# EAGLE board psRevA (EAGLE 7.4.0)
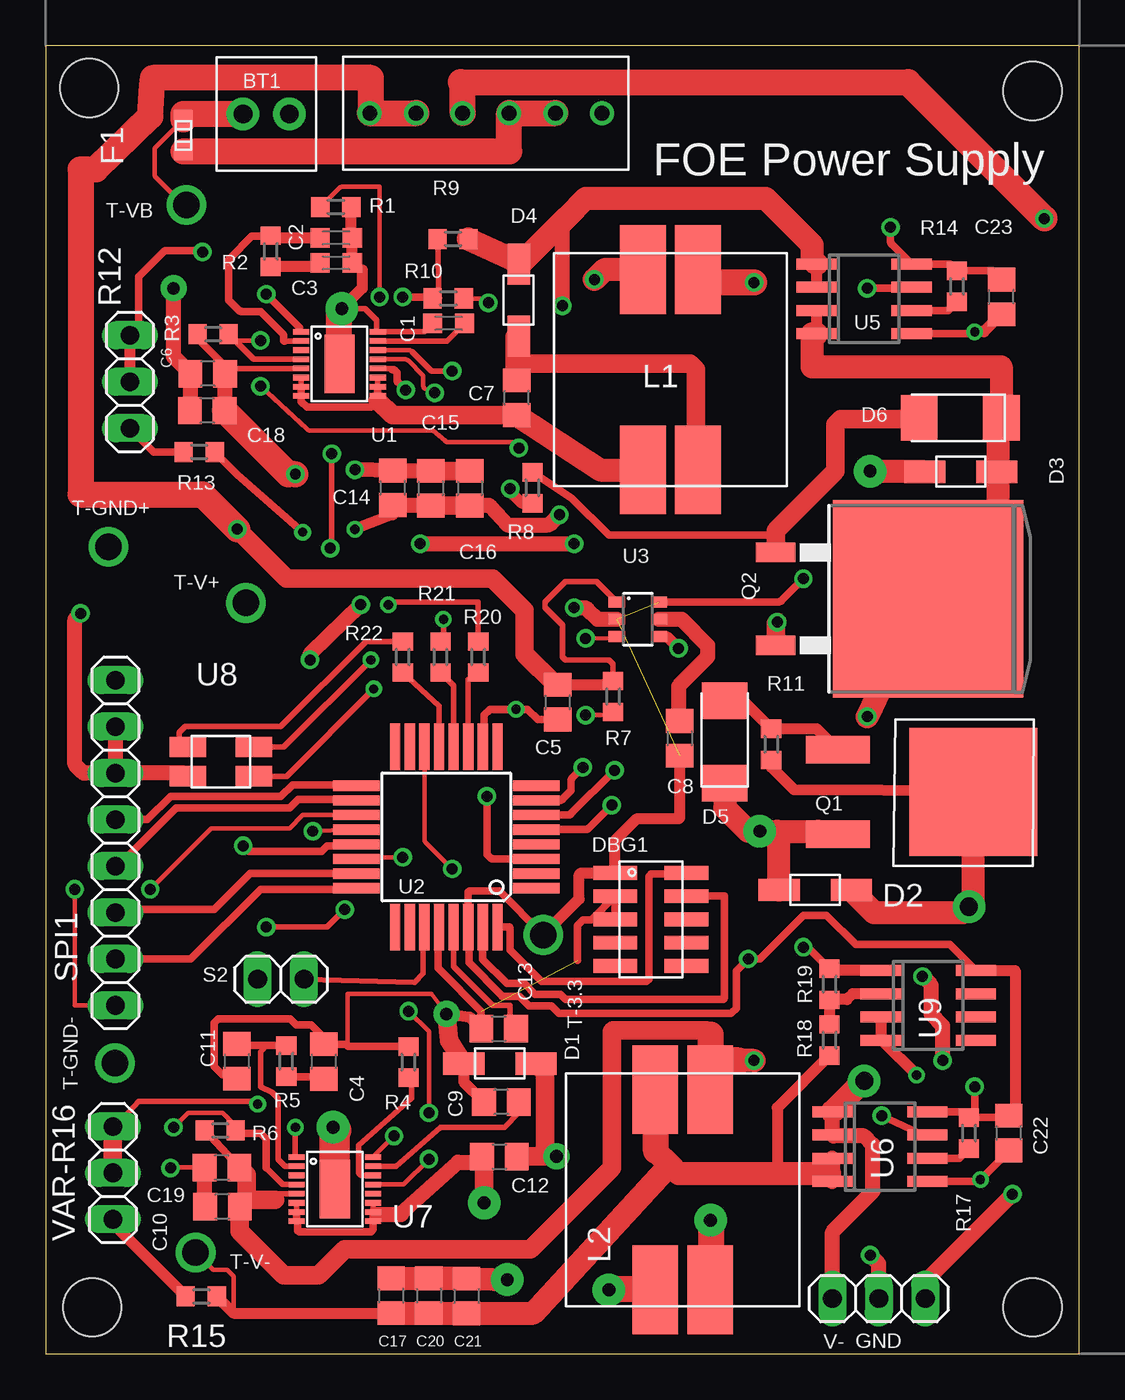
[diagram p0: board, top side]
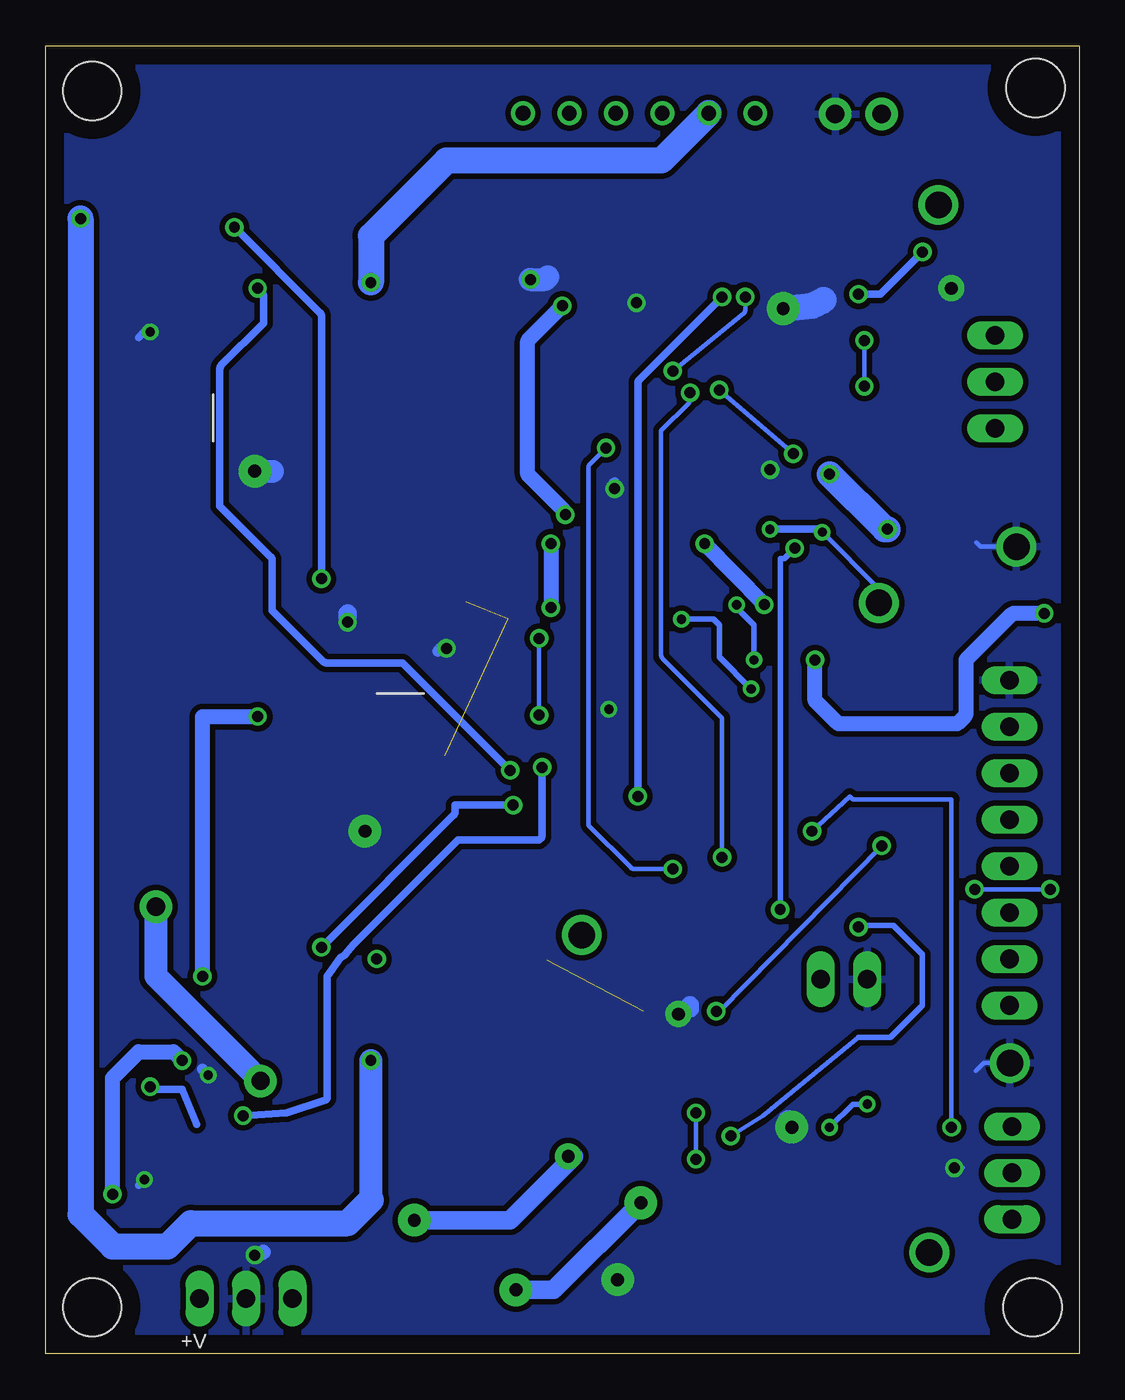
[diagram p1: board, bottom side, seen from below]

Size 56.52 x 71.53 mm. Coordinates in mm from the lower left corner, seen from the top.
Outline: 0,0 56.52,0 56.52,71.53 0,71.53 0,0
Copper layers (1*16): Top 0.035mm / dielectric 1.5mm / Bottom 0.035mm
Design rules "default *": minimum track width 10mil, minimum drill 18mil, track to track 8mil, track to pad 8mil, pad to pad 8mil, via to via 8mil, smd to smd 8mil, copper to edge 40mil, drill to drill 8mil, minimum pad ring 10mil, minimum via ring 8mil, stop-mask expansion 4mil, vias tented up to drill 0mil, thermal gap 10mil
Holes 3.2 mm at 2.54,2.54 53.98,2.54 53.98,69.06 2.38,69.22

## Footprints (pad centres in the part's own frame; a part is rotated, then mirrored left to right if it is on the bottom)
POWERHEAD = drill 1.016 pad 1.778: P$1 -1.27,0; P$2 1.27,0
C0603K = smd 1.05 x 1.08: 1 -0.875,0; 2 0.875,0
C0805 = smd 1.3 x 1.5: 1 -0.95,0; 2 0.95,0
SCHTKYDIODE = smd 2.25 x 1.22: A 3.95,0; C 0,0
ZENER = smd 2 x 2.5: A -0.25,0; C 4.25,0
DEBUGHEAD = smd 0.76 x 2.4: DGND1 1.27,-3.9; DGND2 2.54,-3.9; NC1 3.81,-3.9; NC2 5.08,-3.9; NC3 3.81,0; NC4 2.54,0; NRESET 5.08,0; SWDCLK 1.27,0; SWDIO 0,0; VREF 0,-3.9
FUSE = smd 1 x 1: 1 0,0; 2 1.74,0
COUPLED_INDUCTOR@1 = smd 4.85 x 2.5: L1A 0,3; L1B 10.95,0; L2A 0,0; L2B 10.95,3
COUPLED_INDUCTOR = smd 4.85 x 2.5: L1A 0,3; L1B 10.95,0; L2A 0,0; L2B 10.95,3
DPAKTO252 = smd 1.5 x 3.5: 1 0,-0.5; 3 4.6,-0.5 | smd 7 x 7: 2 2.3,6.9
TO263-3 = smd 1.067 x 2.159: 1 -2.54,-5.791; 3 2.54,-5.791 | smd 10.8 x 10.41: TAB 0,2.54
R0603 = smd 1 x 1.1: 1 -0.85,0; 2 0.85,0
1X03 = drill 1.016 long: 1 -2.54,0; 2 0,0; 3 2.54,0
SWITCHHEAD = drill 0.8: INPUT1 1.27,0; INPUT2 3.81,0; NC 6.35,0; O1 -1.27,0; O3 -6.35,0; O4 -3.81,0
1X02 = drill 1.016 long: 1 -1.27,0; 2 1.27,0
1X08 = drill 1.016 long: 1 -8.89,0; 2 -6.35,0; 3 -3.81,0; 4 -1.27,0; 5 1.27,0; 6 3.81,0; 7 6.35,0; 8 8.89,0
TEST_POINT = drill 1.448: P$1 0,0
LT3581 = smd 0.305 x 0.889: CLKOUT 2.002,4.191; FAULT 1.501,0; FB 0,0; GATE 1.001,0; RT 1.001,4.191; SHDN 1.501,4.191; SS 0.5,4.191; SW1A 2.502,0; SW1B 3.002,0; SW1C 3.503,0; SW2A 2.502,4.191; SW2B 3.002,4.191; SW2C 3.503,4.191; SYNC 0,4.191; VC 0.5,0; VIN 2.002,0 | smd 3.2 x 1.651: GND 1.751,2.095
TQFP32-08 = smd 2.54 x 0.559: 1 -4.928,2.8; 2 -4.928,2; 3 -4.928,1.2; 4 -4.928,0.4; 5 -4.928,-0.4; 6 -4.928,-1.2; 7 -4.928,-2; 8 -4.928,-2.8; 17 4.928,-2.8; 18 4.928,-2; 19 4.928,-1.2; 20 4.928,-0.4; 21 4.928,0.4; 22 4.928,1.2; 23 4.928,2; 24 4.928,2.8 | smd 0.559 x 2.54: 9 -2.8,-4.928; 10 -2,-4.928; 11 -1.2,-4.928; 12 -0.4,-4.928; 13 0.4,-4.928; 14 1.2,-4.928; 15 2,-4.928; 16 2.8,-4.928; 25 2.8,4.928; 26 2,4.928; 27 1.2,4.928; 28 0.4,4.928; 29 -0.4,4.928; 30 -1.2,4.928; 31 -2,4.928; 32 -2.8,4.928
SOT23-6 = smd 0.6 x 0.9: 1 -0.95,-1.15; 2 0,-1.15; 3 0.95,-1.15; 4 0.95,1.15; 5 0,1.15; 6 -0.95,1.15
SOIC8 = smd 0.6 x 2.2: 1 -1.905,-2.6; 2 -0.635,-2.6; 3 0.635,-2.6; 4 1.905,-2.6; 5 1.905,2.6; 6 0.635,2.6; 7 -0.635,2.6; 8 -1.905,2.6
RGBLED = smd 2 x 1.1: 1-RED 0,0; 3-BLUE 3.6,-1.6; 4-GREEN 3.6,0; A 0,-1.6

## Placement (x,y rotation side)
BT1  BATTERY  [POWERHEAD]  12.06,67.79 180 top
C1  100nF  [C0603K]  22.03,56.35 180 top
C2  1nF  [C0603K]  15.89,61.02 0 top
C3  47pF  [C0603K]  15.89,59.65 0 top
C4  47pF  [C0805]  15.21,15.98 90 top
C5  1uF  [C0805]  27.99,35.64 270 top
C6  6.8uF  [C0805]  8.86,53.59 180 top
C7  1uF  [C0805]  25.76,52.27 90 top
C8  10nF  [C0805]  34.67,33.66 270 top
C9  100nF  [C0805]  24.92,13.77 180 top
C10  6.8uF  [C0805]  9.66,8.05 180 top
C11  1nF  [C0805]  10.45,16 270 top
C12  1uF  [C0805]  24.82,10.78 0 top
C13  100nF  [C0805]  24.77,17.78 0 top
C14  10uF  [C0805]  18.97,47.35 270 top
C15  10uF  [C0805]  21.06,47.33 270 top
C16  10uF  [C0805]  23.2,47.33 270 top
C17  3x10uF  [C0805]  18.88,3.17 270 top
C18  6.8uF  [C0805]  8.84,51.57 180 top
C19  6.8uF  [C0805]  9.64,10.19 180 top
C20  10uF  [C0805]  20.95,3.17 270 top
C21  10uF  [C0805]  23.01,3.17 270 top
C22  0.1uF  [C0805]  52.67,12.08 90 top
C23  0.1uF  [C0805]  52.26,57.78 90 top
D1  SCHTKYDIODE  [SCHTKYDIODE]  22.86,15.88 0 top
D2  SCHTKYDIODE  [SCHTKYDIODE]  40.11,25.36 0 top
D3  SCHTKYDIODE  [SCHTKYDIODE]  52.02,48.23 180 top
D4  SCHTKYDIODE  [SCHTKYDIODE]  25.86,59.59 270 top
D5  ZENER  [ZENER]  37.13,35.46 270 top
D6  ZENER  [ZENER]  48.01,51.18 0 top
DBG1  DEBUGHEAD  [DEBUGHEAD]  35.04,26.29 270 top
F1  FUSE  [FUSE]  7.52,67.49 270 top
L1  6.58 uH  [COUPLED_INDUCTOR@1]  32.66,59.28 270 top
L2  6.58 uH  [COUPLED_INDUCTOR]  33.34,14.45 270 top
Q1  PNPDARL  [DPAKTO252]  43.81,33.02 270 top
Q2  NPNDARL  [TO263-3]  45.72,41.27 270 top
R1  180K  [R0603]  15.86,62.7 0 top
R2  11K  [R0603]  12.31,60.29 90 top
R3  100K  [R0603]  9.16,55.75 0 top
R4  180K  [R0603]  19.84,15.95 90 top
R5  11K  [R0603]  13.16,16 90 top
R6  100K  [R0603]  9.54,12.21 0 top
R7  10K  [R0603]  31.03,35.94 270 top
R8  390  [R0603]  26.61,47.35 90 top
R9  698K  [R0603]  22.27,60.96 0 top
R10  300K  [R0603]  22.01,57.71 180 top
R11  390  [R0603]  39.67,33.32 90 top
R12  VARRESISTOR  [1X03]  4.6,53.15 90 top
R13  5k  [R0603]  8.39,49.31 180 top
R14  1k  [R0603]  49.83,58.37 90 top
R15  5k  [R0603]  8.51,3.14 180 top
R17  1k  [R0603]  50.48,12.06 90 top
R18  1M  [R0603]  42.86,17.16 270 top
R19  300k  [R0603]  42.86,20.21 270 top
R20  15  [R0603]  23.65,38.1 90 top
R21  15  [R0603]  21.59,38.1 90 top
R22  70  [R0603]  19.53,38.1 90 top
S1  DPDT  [SWITCHHEAD]  24.07,67.84 0 top
S2  PUSHBTN  [1X02]  12.86,20.48 0 top
SPI1  OLED  [1X08]  3.81,27.94 90 top
T-3.3  TEST_POINT  [TEST_POINT]  27.21,22.9 0 top
T-GND+  TEST_POINT  [TEST_POINT]  3.43,44.13 0 top
T-GND-  TEST_POINT  [TEST_POINT]  3.79,15.89 0 top
T-V+  TEST_POINT  [TEST_POINT]  10.95,41.06 90 top
T-V-  TEST_POINT  [TEST_POINT]  8.2,5.54 0 top
T-VB  TEST_POINT  [TEST_POINT]  7.7,62.83 0 top
U1  LT3581  [LT3581]  13.97,55.88 270 top
U2  SAMD21E  [TQFP32-08]  21.91,28.26 180 top
U3  AS1363  [SOT23-6]  32.38,40.16 270 top
U4  VOUT  [1X03]  45.56,3.02 180 top
U5  ACS711  [SOIC8]  44.75,57.68 270 top
U6  ACS711  [SOIC8]  45.62,11.33 270 top
U7  LT3581  [LT3581]  13.72,10.76 270 top
U8  RGBLED  [RGBLED]  7.78,33.18 0 top
U9  LMC6482  [SOIC8]  48.26,19.05 270 top
VAR-R16  VARRESISTOR  [1X03]  3.67,9.89 90 top

## Library data of the parts
BT1 D1-D6 F1 L1 L2 Q1 Q2 R12 S1 S2 SPI1 T-3.3 T-GND+ T-GND- T-V+ T-V- T-VB U1-U9 VAR-R16 = ps-custom
C1-C23 R1-R11 R13-R15 R17-R22 = resistor
DBG1 = foe-scale

## Nets
3.3V: C8.2 C22.2 C23.2 DBG1.VREF R14.2 R17.2 SPI1.6 SPI1.7 T-3.3.P$1 U2.30 U3.2 U3.6 U5.8 U6.8 U8.A U9.8
GND: BT1.P$1 C1.2 C2.2 C3.2 C4.2 C5.2 C6.2 C9.2 C10.2 C11.2 C13.1 C14.1 C15.1 C16.1 C17.1 C18.2 C19.2 C20.1 C21.1 C22.1 C23.1 D1.C D2.C D3.A D5.C DBG1.DGND1 DBG1.DGND2 L1.L2A Q1.3 Q2.3 R1.2 R4.2 R8.1 R10.1 S2.1 SPI1.8 T-GND+.P$1 T-GND-.P$1 U1.GND U1.SYNC U2.10 U2.28 U3.4 U4.2 U5.5 U6.5 U7.GND U9.3 U9.4
N$1: R1.1 U1.RT
N$2: C1.1 U1.SS
N$3: C3.1 R2.1
N$4: C2.1 R2.2 U1.VC
N$5: R4.1 U7.RT
N$6: C9.1 U7.SS
N$7: C4.1 R5.1
N$8: C11.1 R5.2 U7.VC
N$9: S2.2 U2.27
N$10: D3.C D6.C Q2.TAB U4.1 U5.3 U5.4
N$11: C12.2 D1.A L2.L2B
N$12: R17.1 U6.6
N$13: C8.1 U3.5
N$14: U7.FB VAR-R16.2 VAR-R16.3
N$15: R12.2 R12.3 U1.FB
N$16: R7.2 U3.3
N$17: D5.A Q1.1 R11.2
N$18: D6.A Q2.1 R8.2
N$19: BT1.P$2 F1.1 T-VB.P$1
N$20: C7.1 L1.L1B U1.SW1A U1.SW1B U1.SW1C U1.SW2A U1.SW2B U1.SW2C
N$21: C12.1 L2.L1B U7.SW1A U7.SW1B U7.SW1C U7.SW2A U7.SW2B U7.SW2C
N$22: R15.2 VAR-R16.1
N$23: C7.2 D4.A L1.L2B
N$25: C17.2 C20.2 C21.2 L2.L2A R15.1 R18.2 T-V-.P$1 U6.3 U6.4
N$26: C14.2 C15.2 C16.2 D4.C R9.2 R13.1 T-V+.P$1 U5.1 U5.2
N$27: R12.1 R13.2
N$28: R18.1 R19.2 U9.2
N$30: R14.1 U5.6
N$31: R20.2 U8.4-GREEN
N$32: R21.2 U8.3-BLUE
N$33: R22.2 U8.1-RED
N$34: D2.A Q1.2 R11.1 U4.3 U6.1 U6.2
N$35: R20.1 U2.11
N$36: R21.1 U2.12
N$37: R22.1 U2.13
N$43: C13.2 U2.29
N$44: DBG1.SWDIO U2.32
N$45: DBG1.SWDCLK U2.31
N$46: SPI1.1 U2.19
N$47: SPI1.2 U2.24
N$48: SPI1.3 U2.23
N$49: SPI1.5 U2.17
N$51: SPI1.4 U2.18
N$53: F1.2 S1.INPUT1 S1.INPUT2
PA02-V+SENSE: R9.1 R10.2 U2.3
PA04-V-SENSE: R19.1 U2.5 U9.1
PA05-I+: U2.6 U5.7
PA06-I-: U2.7 U6.7
PA11-FAULT1: R3.2 U1.FAULT U2.14
PA19-FAULT2: R6.2 U2.20 U7.FAULT
PA22-SHDN2: U2.21 U7.SHDN
PA23-SHDN1: U1.SHDN U2.22
SYNC: U1.CLKOUT U7.SYNC
VIN+: C5.1 C6.1 C18.1 L1.L1A R3.1 R7.1 S1.O3 S1.O4 U1.VIN U3.1
VIN-: C10.1 C19.1 L2.L1A R6.1 S1.O1 U7.VIN

## Tracks (layer width: path | path; a pad name or v marks a point on that pad's centre or on a via)
3.3V  (via drill 0.6, 0.6 pad 0.03, 0.6 pad 0.38)  (2 unrouted)
  Top 0.406: U6.8 50.48,13.23 R17.2 | R17.2 52.67,12.91 C22.2 | C23.2 51.79,59.22 R14.2 49.47,59.59 U5.8 46.27,60.67 arc-45 46.2,60.85 v46.2,61.59 | U3.6 40.06,41.11 arc45 40.24,41.19 v41.43,42.39 | v50.8,14.61 50.8,13.34 arc-45 50.73,13.16 R17.2 | U9.8 49.43,22.38 44.29,22.38 42.7,23.97 41.43,23.97 39.05,21.59 v38.42,21.59 37.76,20.93 37.76,18.89 37.48,18.61 28.08,18.61 27.66,19.03 26.43,19.03 25.92,19.55 24.96,19.55 24.96,19.57 23.14,21.39 23.14,23.3 U2.30 23.11,25.25 23.18,25.32 24.7,25.32 24.73,25.3 24.8,25.3 T-3.3.P$1
  Top 0.61: U9.8 53.02,20.95 53.02,13.38 C22.2 | C8.2 34.67,29.31 34.63,29.27 32.34,29.27 31.14,28.06 31.14,26.3 DBG1.VREF 29.27,26.29 29.17,26.19 29.17,24.86 T-3.3.P$1
  Top 0.813: SPI1.7 SPI1.6 | U8.A 7.61,31.75 SPI1.6 | SPI1.6 2.17,31.75 arc-45 1.99,31.82 1.59,32.23 1.59,40.06 arc-45 1.66,40.24 v1.91,40.48 | v14.45,37.94 14.45,38.15 arc-45 14.52,38.33 v17.22,40.96 | v20.48,44.29 v28.89,44.29 | v28.89,40.8 29.42,40.8 arc-45 29.6,40.72 30.16,40.16 U3.2
  Bottom 0.406: v41.43,42.39 41.43,56.73 arc-45 41.51,56.91 v46.2,61.59 | 48.26,12.54 49.05,14.45 50.54,14.45 arc45 50.72,14.52 v50.8,14.61
  Bottom 0.813: v17.22,40.96 v20.48,44.29 | v28.89,44.29 v28.89,40.8 | v1.91,40.48 3.55,40.48 arc-45 3.73,40.41 6.19,37.94 6.19,35.03 arc45 6.27,34.85 6.67,34.45 13.07,34.45 arc45 13.25,34.52 14.45,35.72 v14.45,37.94
GND  (via drill 0.5, 0.6, 0.6 pad 0.03, 0.6 pad 0.38, 0.7 pad 1.42, 0.7 pad 1.78)  (1 unrouted)
  Top 0.254: 21.5,56.03 C1.2 | 16.51,16.83 16.51,19.68 21.11,19.68 v21.91,18.57 | C19.2 6.85,10.19 v6.83,10.16 | R10.1 23.78,57.71 arc-45 23.96,57.63 v24.21,57.47
  Top 0.305: v16.19,57.15 17.46,57.15 18.1,56.52 18.1,55.94 U1.SYNC 20.69,55.88 C1.2
  Top 0.406: U6.5 51.02,9.42 v51.12,9.53 52.67,11.07 C22.1 | U5.5 50.7,55.78 v50.8,55.88 | C13.1 23.82,18.73 21.59,20.95 21.59,20.97 21.45,21.1 21.45,23.28 U2.28 | 15.34,16.8 C4.2 15.56,16.93 | 15.56,16.93 16.41,16.93 16.51,16.83 16.54,16.8 R4.2 | C11.2 10.73,15.24 9.68,15.24 9.21,15.72 9.21,17.78 | 9.21,17.78 | 9.21,17.78 9.21,18.08 9.44,18.31 13.37,18.31 13.7,17.99 14.5,17.99 15.56,16.93 | C5.2 26.91,34.69 26.35,35.24 v25.72,35.24 24.29,35.24 23.97,34.92 23.97,34.13 23.81,33.97 23.81,33.28 U2.10 | DBG1.DGND2 DBG1.DGND1 29.83,23.71 29.37,23.71 29.09,23.43 29.09,21.51
  Top 0.61: U9.3 U9.4 45.72,17.14 v47.62,15.24 | C23.1 51.31,55.88 v50.8,55.88 | R1.2 16.71,61.07 C2.2 C3.2 17.3,59.26 17.3,58.26 v16.19,57.15 | D1.C 22.86,14.87 C9.2 | v21.91,18.57 23.18,18.41 C13.1 | U3.4 33.97,39.21 v34.61,38.58 | R8.1 26.15,46.5 arc-45 25.97,46.58 25.56,46.99 v25.4,47.31
  Top 0.813: C10.2 8.69,8.08 C19.2 | C18.2 7.89,53.57 C6.2 6.99,54.52 v6.99,58.26 | v16.91,48.34 C14.1 21.39,48.3 arc-45 C15.1 | U4.2 45.56,4.92 v45.09,5.4
  Top 1.016: C15.1 C16.1 | D1.C 22.07,17.14 v21.91,18.57 | Q2.3 39.93,39.93 v40.01,40.01
  Top 1.27: C21.1 C20.1 C17.1 22.86,4.13 v25.24,4.05 | D5.C 37.13,29.86 38.42,28.57 v39.05,28.57 40.01,28.57 | 40.01,28.57 42.23,28.57 42.38,28.42 Q1.3 | D2.C 40.11,28.47 40.01,28.57 | D3.A 45.11,48.23 v45.09,48.26 | L1.L2A 30.66,59.28 arc45 30.48,59.21 v30,58.74
  Top 1.422: 16.07,54.93 16.03,54.93 16.03,55.4 | 16.03,55.4 16.03,56.99 v16.19,57.15 | U1.GND 16.07,55.33 arc45 16.03,55.4
  Top 1.676: 15.88,12.22 v15.72,12.38 15.81,12.29 U7.GND
  Bottom 0.254: v6.83,10.16 6.35,10.16 | v24.21,57.47 24.29,57.63 | T-GND-.P$1 5.22,15.89 5.66,15.46 | T-GND+.P$1 5.4,44.13 5.64,44.37
  Bottom 0.406: v51.12,9.53 51.44,9.21 | v50.8,55.88 51.12,55.88 51.44,55.56
  Bottom 0.61: v47.62,15.24 47.94,15.56 | 21.27,19.05 21.27,18.73 21.43,18.57 v21.91,18.57 | v34.61,38.58 34.92,38.58 35.08,38.42 | v25.4,47.31 25.56,47.36 arc45 25.48,47.54 25.4,47.62
  Bottom 0.813: v6.99,58.26 6.83,58.26 | v45.09,5.4 44.61,5.56
  Bottom 1.016: v21.91,18.57 21.27,18.89 21.27,19.05 | v40.01,40.01 40.01,40.48
  Bottom 1.27: v15.72,12.38 15.88,12.7 | v45.09,48.26 44.13,48.26 | v30,58.74 29.32,58.74 arc-45 29.14,58.81 29.05,58.9
  Bottom 1.422: v16.19,57.15 14.61,57.31 13.97,57.63
  pour Bottom (isolate 0.305): 0.16,71.15 54.51,71.12 arc-90 56.2,70.36 56.04,0.32 0.32,0.32
N$1  (via drill 0.6, 0.6 pad 0.03)
  Top 0.254: U1.RT 19.87,54.88 arc-45 20.05,54.8 | R1.1 16.06,63.74 arc-45 16.23,63.82 18.26,63.82 v18.26,57.78
  Top 0.305: 20.05,54.8 21.11,53.74 v22.23,53.74
  Bottom 0.254: v22.23,53.74 18.33,56.92 arc-45 18.26,57.1 v18.26,57.78
N$2
  Top 0.305: U1.SS 21.94,55.38 C1.1
N$3
  Top 0.61: C3.1 14.64,59.44 R2.1
N$4
  Top 0.305: 13.08,55.38 U1.VC
  Top 0.406: 13.08,55.38 arc-45 13.02,55.4 13.02,55.62 arc45 12.94,55.8 11.75,56.99 10.74,56.99 arc-45 10.56,57.07 10,57.63 10,59.74 arc-45 10.08,59.92 11.27,61.12 12.66,61.12 arc-45 12.84,61.04 12.86,61.02
  Top 0.61: R2.2 12.42,61.02 12.86,61.02 C2.1
N$5
  Top 0.305: U7.RT 17.23,9.76 17.11,9.88 17.11,11.39 20,13.97 20,14.94 R4.1
N$6
  Top 0.305: U7.SS 19.15,10.26 21.59,12.38 25.08,12.38 25.87,13.17 C9.1
N$7
  Top 0.406: C4.1 15.09,15.15 R5.1
N$8
  Top 0.305: R5.2 12.09,16.85 11.75,16.51 11.75,14.61 12.38,14.29 12.7,13.97 12.7,10.64 13.08,10.26 U7.VC
  Top 0.406: C11.1 11.02,16.85 R5.2
N$9
  Top 0.305: S2.2 20.16,20.32 20.64,20.8 20.64,23.26 U2.27
N$10  (via drill 0.6)
  Top 0.254: Q2.TAB 48.26,41.91
  Top 0.61: U5.3 U5.4
  Top 0.813: U4.1 48.1,3.97 v52.86,8.73 | v49.05,16.03 49.05,17.94 48.42,18.57 48.42,20.16 v47.94,20.64 | v44.93,34.85 49.21,41.27 49.53,40.96
  Top 1.27: D3.C 52.07,48.18 | 52.07,48.18 52.07,45.72 48.35,42 48.26,41.91 v44.93,34.85 | 52.07,48.18 52.07,50.99 D6.C 52.26,53.98 41.91,53.98 41.91,55.78 U5.4
  Bottom 0.813: v52.86,8.73 52.86,15.08 51.44,16.51 49.53,16.51 v49.05,16.03 | v47.94,20.64 47.94,34.85 v44.93,34.85
N$11  (via drill 0.7 pad 1.42, 0.7 pad 1.78)
  Top 1.016: 36.38,7.28 v36.35,7.3 | v27.94,10.79 27.3,10.79 | 27.3,10.79 25.78,10.79 C12.2 | D1.A 27.3,15.38 27.3,10.79
  Top 1.422: 36.38,7.28 36.38,3.53 L2.L2B
  Bottom 1.016: v36.35,7.3 31.11,7.3 27.62,10.79 v27.94,10.79
N$12
  Top 0.406: U6.6 49.96,10.69 R17.1
N$13
  Top 0.813: U3.5 34.77,40.16 36.2,38.73 36.2,38.1 34.61,36.51 34.61,34.67 C8.1
N$14  (via drill 0.5)
  Top 0.305: U7.FB 13.65,10.82 v13.65,12.38 | VAR-R16.3 3.86,12.43 5.08,13.81 11.43,13.81 v11.59,13.65
  Top 1.016: VAR-R16.3 VAR-R16.2
  Bottom 0.305: v11.59,13.65 12.38,13.65 v13.65,12.38
N$15  (via drill 0.6, 0.6 pad 0.03)
  Top 0.305: 13.9,56.11 13.9,55.95 U1.FB
  Top 0.406: 13.9,56.11 v12.06,57.94 | R12.3 5.01,56.1 arc45 5.08,56.28 5.08,58.9 6.43,60.25 arc-45 6.61,60.33 8.49,60.33 v8.57,60.25
  Top 0.61: R12.3 R12.2
  Bottom 0.406: v8.57,60.25 10.87,57.94 v12.06,57.94
N$16  (via drill 0.6 pad 0.38)
  Top 0.254: U3.3 arc-45 31.21,39.14 v29.53,39.12 | v29.53,34.92 30.44,34.92 arc45 30.62,35 R7.2
  Bottom 0.254: v29.53,39.12 v29.53,34.92
N$17
  Top 0.61: Q1.1 42.16,34.17 R11.2 38.14,35.71 D5.A
N$18
  Top 0.406: R8.2 28.79,46.77 30.8,44.77 39.69,44.77 40.01,45.09
  Top 1.016: D6.A 47.69,51.12 43.5,51.12 43.18,50.8 43.18,48.26 40.01,45.09 39.93,45.01 Q2.1
N$19
  Top 0.254: T-VB.P$1 7.52,62.83 5.95,64.39 5.95,65.92 F1.1
  Top 1.422: BT1.P$2 7.53,67.79 F1.1
N$20
  Top 0.305: U1.SW1B U1.SW1A | U1.SW2B U1.SW2A
  Top 0.406: U1.SW1C U1.SW1B 13.97,52.07 14.29,51.75 17.78,51.75 18.16,52.13 U1.SW2C U1.SW2B
  Top 1.016: 18.16,52.13 18.97,51.32 C7.1
  Top 1.27: C7.1 30.33,48.33 L1.L1B
N$21  (via drill 0.7 pad 1.78)
  Top 0.305: U7.SW1A U7.SW1B | U7.SW2A 17.91,7.81 18.1,7.62
  Top 0.406: U7.SW1B U7.SW1C arc-45 13.77,7.13 13.77,6.74 13.77,6.74 arc45 13.95,6.67 17.78,6.67 17.83,6.72 arc45 17.91,6.9 U7.SW2B | U7.SW2C U7.SW2B | 17.91,7.81 U7.SW2B
  Top 0.813: 18.1,7.62 19.43,7.62 19.43,7.69 22.54,10.48 23.56,10.48 C12.1
  Top 1.016: 30.85,3.55 v30.8,3.49 | v23.97,8.26 23.97,10.68 C12.1
  Top 1.422: 30.85,3.55 33.29,3.55 L2.L1B
  Bottom 1.016: v30.8,3.49 28.73,3.49 v23.97,8.26
N$22
  Top 0.61: VAR-R16.1 3.67,7.13 R15.2
N$23
  Top 1.016: L1.L2B 35.56,48.44 35.56,53.82 35.24,54.13 25.76,54.13
  Top 1.27: D4.A 25.76,55.59 25.76,54.13 C7.2
N$25
  Top 0.254: 10.27,2.23 10.27,4.24 9.92,4.58 9.15,4.58 T-V-.P$1
  Top 0.61: R18.2 40.01,13.45 40.01,9.84 | R15.1 10.27,2.23 C17.2 | C20.2
  Top 0.813: U6.4 U6.3 42.86,10.54 42.86,9.84
  Top 1.27: 42.86,9.84 40.01,9.84 34.61,9.84 34.13,10.32 | 34.13,10.32 33.38,11.07 | C17.2 C20.2 | C20.2 C21.2 26.67,2.22 34.13,10.32
  Top 1.422: 33.38,11.07 33.38,13.85 33.5,13.97 33.5,14.29 L2.L2A
N$26  (via drill 0.5, 0.6 pad 0.03)
  Top 0.406: R13.1 10.48,48.08 v14.05,44.93
  Top 0.61: U5.1 U5.2 | C14.2 18.97,45.88 v16.91,45.09
  Top 0.813: C14.2 23.09,46.4 | 23.09,46.4 C16.2 | 23.09,46.4 24.14,46.4 arc-45 24.32,46.33 25.24,45.32 27.44,45.32 arc45 27.7,45.48 v28.1,45.88 | v28.26,57.31 28.26,61.81 arc-45 28.33,61.99 28.5,62.15
  Top 1.016: C15.2 C16.2
  Top 1.27: R9.2 25.7,59.77 D4.C 25.93,59.59 28.5,62.15 29.53,63.18 39.37,63.18 41.91,60.64 41.91,59.83 U5.1
  Bottom 0.254: T-V+.P$1 10.95,41.83 v14.05,44.93
  Bottom 0.406: v14.05,44.93 14.29,45.09 v16.91,45.09
  Bottom 0.813: v28.1,45.88 28.1,45.93 arc-45 28.17,46.11 30.16,48.1 30.16,55.3 arc45 30.09,55.48 v28.26,57.31
N$27
  Top 0.406: R12.1 5.89,49.31 R13.2
N$28
  Top 0.61: U9.2 44.13,19.68 43.81,19.37 42.87,19.37 R19.2 R18.1
N$30
  Top 0.406: U5.6 49.36,57.05 R14.1
N$31  (via drill 0.5)
  Top 0.305: U8.4-GREEN 13.02,33.18 v17.78,37.94 | R20.2 23.65,41.12 18.89,41.12 v18.73,40.96
  Bottom 0.305: v17.78,37.94 17.78,39.85 18.73,40.8 v18.73,40.96
N$32  (via drill 0.5)
  Top 0.305: U8.3-BLUE 13.16,31.58 v17.94,36.35 | v21.75,40.16 21.75,39.11 R21.2
  Bottom 0.305: v17.94,36.35 19.68,38.1 19.68,39.85 20,40.16 v21.75,40.16
N$33
  Top 0.305: R22.2 17.52,38.95 12.86,34.29 7.62,34.29 7.3,33.97 7.3,33.66 U8.1-RED
N$34  (via drill 1 pad 1.78)
  Top 0.61: R11.1 39.67,32.08 40.92,30.86 50.64,30.8 Q1.2
  Top 0.813: U6.1 U6.2 43.08,11.91 44.77,11.91 45.24,11.43 45.24,8.89 43.02,6.67 U4.3
  Top 1.27: D2.A 45.29,24.13 50.16,24.13 v50.48,24.45 50.72,24.68 Q1.2 | U6.1 44.71,14.92 v44.77,14.92
  Bottom 1.27: v44.77,14.92 50.48,20.64 v50.48,24.45
N$35
  Top 0.305: U2.11 23.11,36.86 R20.1
N$36
  Top 0.305: U2.12 22.31,36.53 R21.1
N$37
  Top 0.305: U2.13 21.51,35.43 R22.1
N$43
  Top 0.305: U2.29 22.31,21.19 24.45,19.05 25.4,19.05 25.4,18.09 C13.2
N$44
  Top 0.406: DBG1.SWDIO 34.98,26.23 33.1,26.23 32.98,26.11 32.98,20.48 32.86,20.36 27.13,20.36 25.4,22.09 25.4,23.3 25.37,23.33 U2.32
N$45
  Top 0.406: U2.31 23.89,23.31 23.89,21.57 25.22,20.24 26.19,20.24 26.77,19.66 28.14,19.66 28.42,19.39 37.07,19.39 37.13,19.45 37.13,25 37.11,25.02 DBG1.SWDCLK
N$46  (via drill 0.6 pad 0.38)
  Top 0.254: SPI1.1 1.59,19.05 v1.59,25.4 | U2.19 14.06,29.46 13.34,28.73 9.05,28.73 v5.71,25.4
  Bottom 0.254: v5.71,25.4 v1.59,25.4
N$47
  Top 0.406: SPI1.2 7.94,21.59 11.75,25.4 16.92,25.4 U2.24
N$48
  Top 0.406: U2.23 11.18,26.26 9.21,24.29 3.97,24.29 SPI1.3
N$49
  Top 0.406: SPI1.5 5.56,29.21 6.83,30.48 12.86,30.48 13.49,31.11 17.62,31.11 17.78,30.96 17.08,30.96 U2.17
N$51
  Top 0.406: SPI1.4 3.97,26.83 4.13,26.83 7.14,29.84 13.34,29.84 13.81,30.32 16.92,30.32 U2.18
N$53
  Top 1.422: F1.2 25.34,65.75 S1.INPUT1 S1.INPUT2
PA02-V+SENSE  (via drill 0.6 pad 0.38)
  Top 0.305: R10.2 21.5,57.73 R9.1
  Top 0.406: U2.3 24.48,27.06 arc-45 24.3,27.13 24.13,27.3 v24.13,30.48 | v19.53,57.78 21.3,57.78 arc-45 21.48,57.71 R10.2
  Bottom 0.406: v24.13,30.48 24.13,53.08 arc45 24.06,53.26 v19.53,57.78
PA04-V-SENSE  (via drill 0.6 pad 0.38)
  Top 0.406: U2.5 29.5,28.66 arc45 29.68,28.73 v30.96,30 | v41.43,22.23 41.59,22.23 arc-45 41.77,22.15 R19.1
  Top 0.61: U9.1 42.96,20.95 R19.1
  Bottom 0.406: v30.96,30 34.13,30 34.13,29.63 arc45 34.21,29.45 v41.43,22.23
PA05-I+  (via drill 0.6 pad 0.38)
  Top 0.406: U2.6 28.56,29.46 arc45 28.74,29.53 v31.11,31.91 | v44.93,58.26 47.22,58.26 arc45 U5.7
  Bottom 0.406: v31.11,31.91 36.99,37.78 41.17,37.78 arc45 41.35,37.86 44.13,40.64 44.13,43.39 arc-45 44.21,43.57 46.99,46.35 46.99,53.87 arc45 46.92,54.05 44.61,56.36 44.61,57.84 arc-45 44.68,58.02 v44.93,58.26
PA06-I-  (via drill 0.6 pad 0.38)
  Top 0.406: v45.72,13.02 48.08,11.91 arc45 U6.7 | U2.7 28.09,30.26 arc45 28.27,30.33 28.73,30.8 28.73,31.33 arc-45 28.81,31.51 v29.37,32.07
  Bottom 0.406: v29.37,32.07 29.37,28.36 arc45 29.44,28.18 29.53,28.1 33.97,28.1 39.69,22.38 40.01,22.01 arc45 40.4,21.67 41.12,20.64 41.12,14.07 arc45 41.19,13.9 43.34,13.18 v45.72,13.02
PA11-FAULT1  (via drill 0.6 pad 0.03)
  Top 0.254: U2.14 20.71,28.13 arc45 20.78,27.95 v22.23,26.51 | v25.88,49.53 25.56,49.85 22.01,49.85 arc-45 21.83,49.92 21.19,50.48 14.47,50.48 arc-45 14.29,50.56 v11.75,52.9 | v11.75,55.4 10.46,55.4 arc-45 10.28,55.48 R3.2
  Top 0.305: U1.FAULT 11.38,54.38 R3.2
  Bottom 0.254: v22.23,26.51 24.34,26.51 arc45 24.52,26.59 26.83,28.89 26.83,48.47 arc45 26.75,48.65 v25.88,49.53 | v11.75,52.9 v11.75,55.4
PA19-FAULT2  (via drill 0.6)
  Top 0.254: 11.75,12.06 10.79,12.06 9.68,13.18 7.78,13.18 v6.99,12.38 | v14.61,28.57 17.14,28.7 17.78,28.73
  Top 0.305: 12.06,10.16 12.97,9.26 U7.FAULT
  Top 0.406: R6.2 10.62,12.06 11.75,12.06 12.06,11.75 12.06,10.16 | U2.20 17.03,28.66 arc45 17.14,28.7
  Bottom 0.254: v6.99,12.38 6.99,30.32 12.38,30.32 12.54,30.48 v14.61,28.57
PA22-SHDN2  (via drill 0.6)
  Top 0.254: U7.SHDN 19.57,9.26 v20.95,10.64 | v20.95,13.18 20.95,17.62 v19.84,18.73 | 17.37,27.94 U2.21 17.06,27.94 17.62,27.94 17.46,27.78
  Top 0.406: 17.46,27.78 15.4,27.78 15.08,27.46 11.11,27.46 v10.79,27.78
  Bottom 0.254: v20.95,10.64 v20.95,13.18 | v19.84,18.73 19.68,18.73 v10.79,27.78
PA23-SHDN1  (via drill 0.6 pad 0.03)
  Top 0.254: U1.SHDN 19.65,54.38 arc-45 19.83,54.3 20.64,53.5 20.64,52.97 arc45 20.71,52.79 v21.27,52.55 | v19.53,27.15 17.17,27.15 arc45 16.99,27.07 U2.22
  Bottom 0.254: v21.27,52.55 21.27,52.17 arc45 21.35,52 22.86,50.48 22.86,38.2 arc-45 22.79,38.03 19.53,34.77 v19.53,27.15
SYNC  (via drill 0.6, 0.6 pad 0.03)
  Top 0.254: U7.SYNC v19.05,11.91
  Top 0.305: U1.CLKOUT 18.88,53.88 18.95,53.82 | v12.06,23.34 15.4,23.34 v16.35,24.29 | v15.64,49.21 15.64,44.13 v15.56,44.05
  Top 0.406: 18.95,53.82 arc-45 19.12,53.74 19.21,53.66 19.21,53.29 arc45 19.28,53.11 v19.68,52.7
  Bottom 0.254: v19.05,11.91 17.3,13.02 12.06,17.3 | v15.64,49.21 v19.68,52.7
  Bottom 0.305: 12.06,17.3 10.32,17.3 8.57,19.05 8.57,21.83 10.16,23.42 11.99,23.42 v12.06,23.34 | v16.35,24.29 16.35,43.48 16.13,43.48 v15.56,44.05
VIN+  (via drill 0.6)
  Top 0.305: C6.1 10.1,53.88 U1.VIN | R7.1 31.03,37.71 30.8,37.94 28.42,37.94 28.26,38.1 28.26,39.85 27.3,40.8 27.3,41.12 28.42,42.23 30.12,42.23 U3.1
  Top 0.406: R3.1 8.31,55.51 9.81,54 C6.1
  Top 0.61: C5.1 30.5,36.59 R7.1
  Top 0.813: C6.1 9.79,53.57 C18.1
  Top 1.016: C5.1 27.87,36.59 26.19,38.26 26.19,40.64 24.45,42.39 13.18,42.39 v10.48,45.09
  Top 1.422: 17.78,67.84 S1.O4 | S1.O3 17.78,67.84 | 17.78,67.84 17.78,69.77 5.87,69.77 5.81,69.33 5.71,67.67 2.74,64.77 1.91,64.77 1.91,46.99 8.57,46.99 v10.48,45.09 | v13.65,48.1 13.26,48.1 C18.1 | v38.73,58.58 36.37,58.58 L1.L1A
  Bottom 1.422: v10.48,45.09 10.64,45.09 v13.65,48.1 | S1.O4 22.85,65.25 34.61,65.25 38.73,61.12 v38.73,58.58
VIN-  (via drill 0.6)
  Top 0.305: U7.VIN 12.72,8.76 12.38,8.41
  Top 0.406: R6.1 8.69,12.25 C19.1
  Top 1.016: 36.35,17.46 36.14,17.68 31.01,17.68 30.96,17.62 30.96,10.16 26.51,5.71 16.35,5.71 14.92,4.29 13.02,4.29 10.62,6.69 C10.1 10.98,8.41 | 36.35,15.56 36.35,14.13 36.2,13.97 36.2,14.32 | 12.54,8.41 12.38,8.41 10.98,8.41 | 10.98,8.41 10.98,9.8 C19.1
  Top 1.27: v38.73,16.03 37.91,16.03
  Top 1.422: S1.O1 22.8,69.44 22.7,69.53 47.15,69.53 v54.61,62.07 | 36.35,17.46 36.35,15.56 | 36.35,15.56 36.35,14.46 L2.L1A | 37.91,16.03 36.83,16.03 36.35,15.56
  Bottom 1.27: 38.73,8.41 v38.73,16.03
  Bottom 1.422: v54.61,62.07 54.61,7.62 52.86,5.87 49.85,5.87 48.58,7.14 40.01,7.14 38.73,8.41

## Text on the board
tPlace: FOE Power Supply | T-3.3 | T-V-
tNames: V- | GND
bNames: V+